# Altium PCB PCB1.PcbDoc
Units mil, origin at the board's own origin, x right, y up, seen from the top; angles counter-clockwise.
Board outline 3135 x 1590 mil, 2 copper layers (Top Layer, Bottom Layer); 34 components, 24 nets, 154 pads, 16 vias.
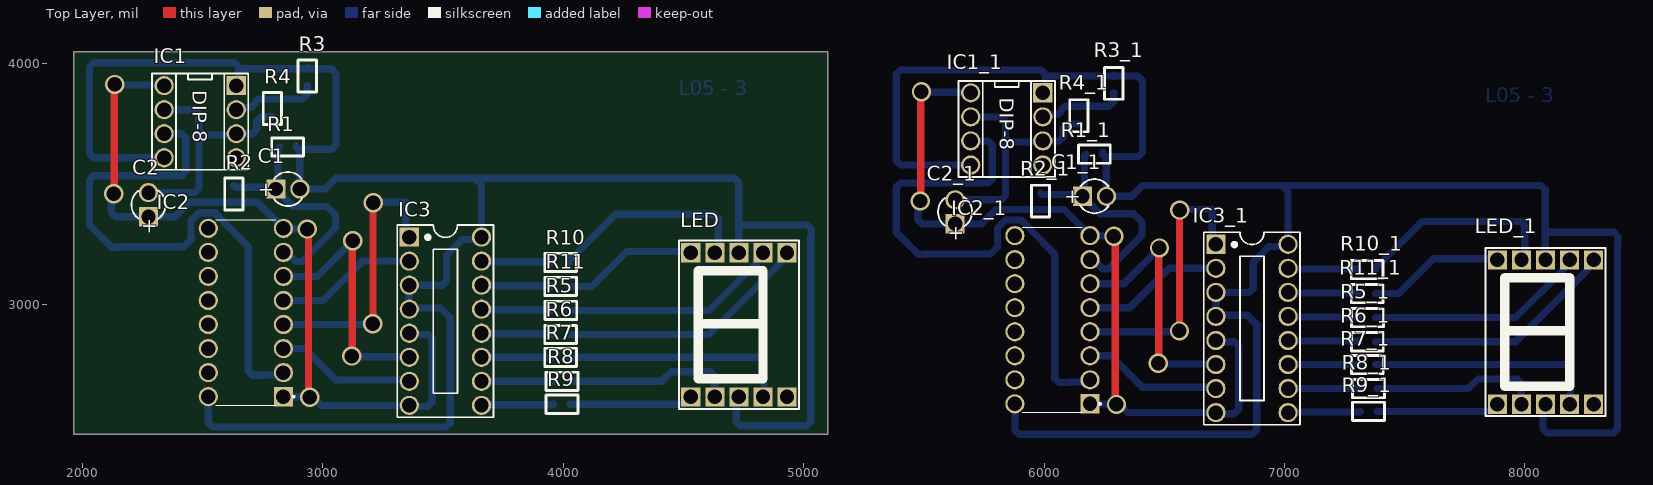
[diagram p0: Top Layer view]
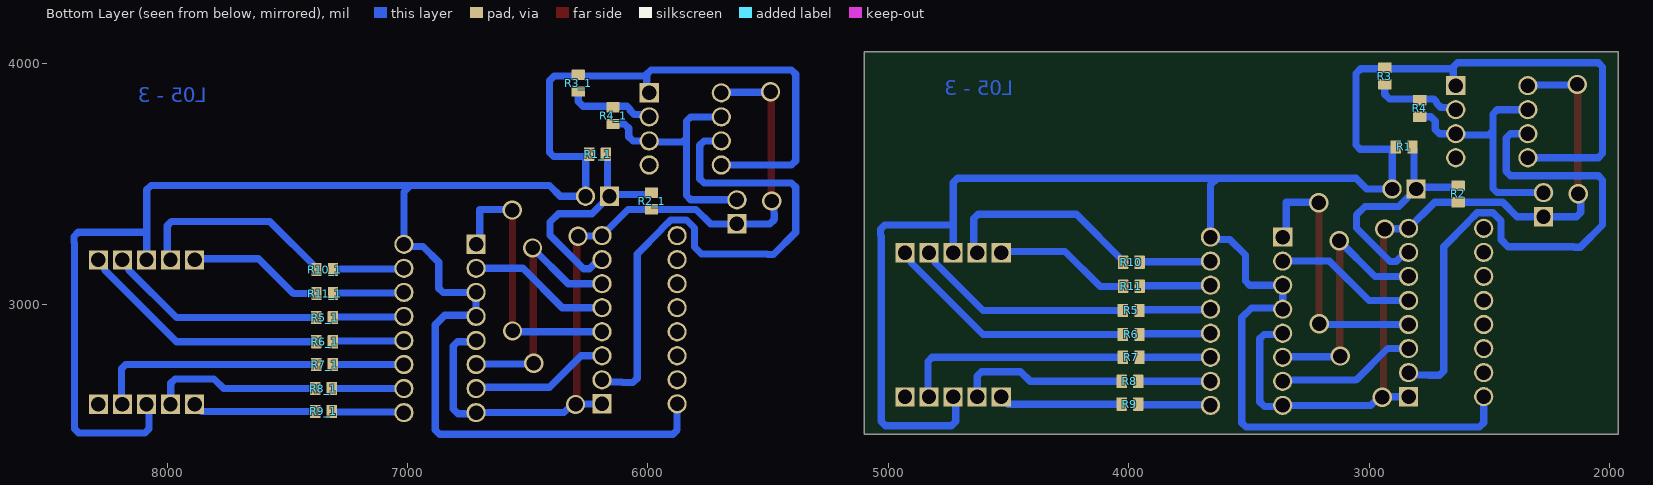
[diagram p1: Bottom Layer view, seen from below]

## Layer stack, top to bottom
Top Solder: solder mask 0.4, Solder Resist, Dk 3.5
Top Layer: signal copper 1.4
Dielectric 1: dielectric 12.6, FR-4, Dk 4.8
Bottom Layer: signal copper 1.4
Bottom Solder: solder mask 0.4, Solder Resist, Dk 3.5

## Board outline
1965,2460 5100,2460 5100,4050 1965,4050

## Design rules (kind name [scope] priority, off if disabled: settings)
Clearance [All] p1: gap=10 ignorepadtopadclearanceinfootprint=FALSE except(0: Arc-Hole Track-Hole SMDPad-Hole THPad-Hole Via-Hole Fill-Hole Poly-Hole Region-Hole Text-Hole)
PolygonConnect [All] p1: connectstyle=Relief reliefconductorwidth=10 reliefentries=4 polygonreliefangle="90 Angle" airgapwidth=10
RoutingVias [All] p1: holewidth=28 width=50 viastyle="Through Hole" minholewidth=28 minwidth=50 maxholewidth=28 maxwidth=50
SolderMaskExpansion [All] p1: expansion=4 istentingtop=FALSE
Width [All] p1: maxlimit=30 minlimit=30 preferedwidth=30
30 further rules are at their usual default settings.

## Classes and differential pairs
component class Sheet1: C1 C2 IC1 IC3 LED R1 R2 R3 R4 R5 R6 R7 R8 R9 R10 R11

## Components (designator, comment, footprint, x,y, rotation, side; value= is the part's Value field where it differs from the comment)
C1 "Cap" C3MM 2855,3480 r0 top value=4.7uF
C1_1 "Cap" C3MM 6210,3450 r0 top value=4.7uF (schematic designator C1)
C2 "Cap" C3MM 2275,3415 r90 top value=4.7uF
C2_1 "Cap" C3MM 5630,3385 r90 top value=4.7uF (schematic designator C2)
IC1 "LM555" DIP8 2490,3760 r270 top
IC1_1 "LM555" DIP8 5845,3730 r270 top (schematic designator IC1)
IC2 "IC4518" DIP794W45P254L1969H508Q16 2680,2966.3 r180 top
IC2_1 "IC4518" DIP794W45P254L1969H508Q16 6035,2936.3 r180 top (schematic designator IC2)
IC3 "IC7447" DIP16/W0.3 3360,3280 r270 top value="7447 , 74247"
IC3_1 "IC7447" DIP16/W0.3 6715,3250 r270 top value="7447 , 74247" (schematic designator IC3)
LED "7SEG-A" LED7SEG 4730,2915 r0 top
LED_1 "7SEG-A" LED7SEG 8085,2885 r0 top (schematic designator LED)
R1 "32K" "Res 0805 SMD" 2854.45,3655 r0 top
R1_1 "32K" "Res 0805 SMD" 6209.45,3625 r0 top (schematic designator R1)
R2 "6.8K" "Res 0805 SMD" 2630,3459.45 r90 top
R2_1 "6.8K" "Res 0805 SMD" 5985,3429.45 r90 top (schematic designator R2)
R3 "1.5K" "Res 0805 SMD" 2935,3950 r90 top
R3_1 "1.5K" "Res 0805 SMD" 6290,3920 r90 top (schematic designator R3)
R4 "82K" "Res 0805 SMD" 2790,3815 r90 top
R4_1 "82K" "Res 0805 SMD" 6145,3785 r90 top (schematic designator R4)
R5 "470" "Res 0805 SMD" 3990,2975 r180 top
R5_1 "470" "Res 0805 SMD" 7345,2945 r180 top (schematic designator R5)
R6 "470" "Res 0805 SMD" 3990,2875 r0 top
R6_1 "470" "Res 0805 SMD" 7345,2845 r0 top (schematic designator R6)
R7 "470" "Res 0805 SMD" 3990,2780 r0 top
R7_1 "470" "Res 0805 SMD" 7345,2750 r0 top (schematic designator R7)
R8 "470" "Res 0805 SMD" 3995,2680 r0 top
R8_1 "470" "Res 0805 SMD" 7350,2650 r0 top (schematic designator R8)
R9 "470" "Res 0805 SMD" 3995,2585 r0 top
R9_1 "470" "Res 0805 SMD" 7350,2555 r0 top (schematic designator R9)
R10 "470" "Res 0805 SMD" 3989.45,3175 r0 top
R10_1 "470" "Res 0805 SMD" 7344.45,3145 r0 top (schematic designator R10)
R11 "470" "Res 0805 SMD" 3989.45,3075 r0 top
R11_1 "470" "Res 0805 SMD" 7344.45,3045 r0 top (schematic designator R11)

## Footprints (in the part's own frame and the unit in brackets; to place one, negate y for a bottom-side part, rotate by r counter-clockwise, add the part's x,y. Pads: shape width x height; smd on the part's side, far side on the other; paste and mask are expansions set on the pad)
C3MM [mil]
  rect 80x80 hole 60: 1(-50,0)
  round 80 hole 60: 2(50,0)
  silkscreen extent -59,-71 59,71, body extent -79,-80 78,78, height 276
DIP8 [mil] "W.300/L.400"
  round 80 hole 60: 1(-150,-150) 2(-50,-150) 3(50,-150) 4(150,-150) 5(150,150) 6(50,150) 7(-50,150)
  rect 80x80 hole 60: 8(-150,150)
  silkscreen extent -200,-200 200,200, body extent -213,-153 213,153, height 177
DIP16/W0.3 [mil] "16 PIN, W 300mil, Pin to pin 100mil"
  rect 80x80 hole 60: 1(0,0)
  round 80 hole 60: 2(100,0) 3(200,0) 4(300,0) 5(400,0) 6(500,0) 7(600,0) 8(700,0) 9(700,300) 10(600,300) 11(500,300) 12(400,300) 13(300,300) 14(200,300) 15(100,300) 16(0,300)
  silkscreen extent -50,-50 750,350, body extent -52,-57 752,356, height 299
DIP794W45P254L1969H508Q16 [mil]
  rect 80x80 hole 60: 1(-156.3,350)
  round 80 hole 60: 2(-156.3,250) 3(-156.3,150) 4(-156.3,50) 5(-156.3,-50) 6(-156.3,-150) 7(-156.3,-250) 8(-156.3,-350) 9(156.3,-350) 10(156.3,-250) 11(156.3,-150) 12(156.3,-50) 13(156.3,50) 14(156.3,150) 15(156.3,250) 16(156.3,350)
  silkscreen extent -202,-385 125,385, body extent -380,-215 380,215, height 200
LED7SEG [mil] "LED7SEG"
  round 60 on Top Overlay: 0(186,-210)
  rect 80x80 hole 60: 1(-199,-300) 2(-99,-300) 3(1,-300) 4(101,-300) 5(201,-300) 6(201,300) 7(101,300) 8(1,300) 9(-99,300) 10(-199,300)
  silkscreen extent -249,-350 251,350, body extent -250,-375 250,375, height 316
"Res 0805 SMD" [mm] "Reflow Soldering"
  rrect10% 1.1x1.4 smd far side mask+0.1: 1(-0.875,0) 2(0.875,0)
  silkscreen extent -1.69,-0.97 1.67,0.96, body extent -1,-0.62 1,0.63, height 0.62

## Part data
C1 C1_1 C2 C2_1: "Capacitor", LatestRevisionDate=17-Jul-2002, LatestRevisionNote="Re-released for DXP Platform.", PackageReference=RAD-0.3, Published=8-Jun-2000, Publisher="Altium Limited"
IC1 IC1_1: "Timer"
IC2 IC2_1: library part CD4518BE, "CMOS Dual BCD Up-Counter 16-PDIP -55 to 125", Package="PDIP-16 Texas Instruments", Availability=Good, Check_prices=https://www.snapeda.com/parts/CD4518BE/Texas%20Instruments/view-part/2251593/?ref=eda, MF="Texas Instruments", MP=CD4518BE, Price=None, Purchase-URL=https://pricing.snapeda.com/search/part/CD4518BE/?ref=eda, SnapEDA_Link=https://www.snapeda.com/parts/CD4518BE/Texas%20Instruments/view-part/2251593/?ref=snap
IC3 IC3_1: library part 7447, "BCD to 7-Segment Decoder/Driver"
LED LED_1: library part LED7SEG-A, "14.2 mm General Purpose Blue 7-Segment Display: CA, RH DP, Gray Surface", Colour=Blue, PackageDocument=24-Sep-2002, ComponentLink1Description="Manufacturer Link", ComponentLink1URL=http://www.agilent.com/, DatasheetDocument=24-Sep-2002, LatestRevisionDate=17-Dec-2003, LatestRevisionNote="Schematic revised, PCB Footprint replaced.", MinimumIntensity="2020 ucd", Note="IF = 10 mA", PackageReference=H, Published=8-Jun-2000, Publisher="Altium Limited"
R1 R1_1 R2 R2_1 R3 R3_1 R4 R4_1 R5 R5_1 R6 R6_1 R7 R7_1 R8 R8_1 R9 R9_1 R10 R10_1 R11 R11_1: library part RES-0805, "RES SMD 249K OHM 1% 1/10W 0805", Manufacturer=Yageo, Manufacturer Part Number=RC0603FR-07249KL, Operating Temperature="-55°C ~ 155°C", Package / Case="0603 (1608 Metric)", Power (Watts)="0.1W, 1/10W", Supplier Device Package=0603, Temperature Coefficient=±100ppm/°C, Tolerance=±1%, Category=Resistors, ComponentLink1Description=http://www.yageo.com/documents/recent/PYu-RC_Group_51_RoHS_L_8.pdf, ComponentLink1URL=http://www.yageo.com/documents/recent/PYu-RC_Group_51_RoHS_L_8.pdf, Composition="Thick Film", Failure Rate=-, Features="Moisture Resistant", Height - Seated (Max)="0.022\" (0.55mm)", Packaging="Cut Tape (CT)", Part Status=Active, Pricing 1="1=0.1, 10=0.015, 100=0.006, 1000=0.00268, 2500=0.00233 (USD)", RoHS="RoHS Compliant", Size / Dimension="0.063\" L x 0.032\" W (1.60mm x 0.80mm)", Stock 1=370515, Supplier 1=Digi-Key

## Via types
v1: diameter 80, hole 60, Top Layer to Bottom Layer, 16 vias

## Nets (pads, with @x,y where several pads share a name; then routed paths per layer and width w, separated by ;. In a path a pad name is that pad's centre, name@x,y a point inside that pad or via, vN(x,y) a via of type N, cw(c..) or ccw(c..) an arc to the next point about the centre after c; other vN are vias at no path point)
GND: C2.1 IC1.1 IC2.1 IC2.8 IC3.5 IC3.8 R2.1 | length 3354
  Top Layer w30: v1(2130,3460) 2132.5,3462.5 2132.5,3912.5 v1(2135,3915) ; v1(2935.62,3313.14) 2940.87,3307.89 2940.87,2619.39 v1(2946.11,2614.15)
  Bottom Layer w30: v1(2130,3460) 2120.43,3450.43 2120.43,3407.86 2120,3407.43 2120,3382.57 2137.57,3365 C2.1 2385,3365 2445,3425 2727.6,3425 IC2.8 2837.88,3314.72 2934.04,3314.72 v1(2935.62,3313.14) ; v1(2135,3915) 2137.5,3912.5 2337.5,3912.5 IC1.1 ; IC2.1 2943.96,2616.3 v1(2946.11,2614.15) 2959.64,2614.15 2993.79,2580 IC3.8 3365,2575 3435,2575 3455,2595 3455,2857.43 3437.43,2875 3365,2875 IC3.5
NetC1_1: C1.1 IC2.7 R1.1 R2.2 | length 998.7
  Top Layer w30: C1.1@2797.76,3487.24 C1.1 C1.1@2813.35,3488.35
  Bottom Layer w30: R2.2 2636.65,3487.24 C1.1@2797.76,3487.24 ; C1.1 2877.5,3407.5 3017.5,3407.5 3052.57,3372.43 3052.57,3317.57 2913.28,3178.28 2887.84,3178.28 2849.83,3216.3 IC2.7 ; C1.1@2813.35,3488.35 2813.35,3648.35 R1.1
NetC2_2: C2.2 IC1.2 IC1.6 R4.1 | length 1071.1
  Bottom Layer w30: C2.2@2247.59,3465 2467.43,3465 2485,3482.57 2485,3722.57 ; IC1.2 2467.43,3810 2485,3792.43 2485,3722.57 ; R4.1 2742.57,3780.55 2725,3762.98 2725,3727.57 2707.43,3710 IC1.6 2635,3705 2502.57,3705 2485,3722.57
NetIC1_3: IC1.3 IC2.2 | length 2378.5
  Bottom Layer w30: IC1.3 2412.43,3710 2430,3692.43 2430,3552.57 2412.43,3535 2047.57,3535 2030,3517.43 2030,3330 2122.57,3237.43 2147.43,3237.43 2150,3240 2422.43,3240 2451.21,3268.79 2451.21,3347.43 2485.09,3381.3 2550.62,3381.3 2588.7,3343.22 2588.7,3341.3 2690,3240 2690,2722.57 2707.57,2705 2751.47,2705 2753.2,2706.73 2826.73,2706.73 IC2.2
NetIC1_7: IC1.7 R3.1 R4.2 | length 361.4
  Bottom Layer w30: IC1.7 2649.57,3819.57 2702.43,3819.57 2720,3837.14 2720,3842.43 2731.94,3854.37 2915.63,3854.37 2935,3873.74 R3.1@2935,3910.63
NetIC2_3: IC2.3 IC3.7 | length 580.2
  Bottom Layer w30: IC2.3 2923.7,2816.3 3055,2685 3355,2685 IC3.7
NetIC2_4: IC2.4 IC3.1 | length 1164.1
  Top Layer w30: v1(3208.27,2919.67) 3209.08,2920.48 3209.08,3421.54 v1(3209.89,3422.35)
  Bottom Layer w30: IC2.4 3204.89,2916.3 v1(3208.27,2919.67) ; v1(3209.89,3422.35) 3212.53,3425 3345,3425 3345,3295 IC3.1
NetIC2_5: IC2.5 IC3.2 | length 591.5
  Bottom Layer w30: IC2.5 3001.3,3016.3 3165,3180 IC3.2
NetIC2_6: IC2.6 IC3.6 | length 1074.4
  Top Layer w30: v1(3120,2785) 3122.5,2787.5 3122.5,3262.5 v1(3125,3265)
  Bottom Layer w30: IC2.6 2976.3,3116.3 v1(3125,3265) ; v1(3120,2785) 3122.5,2782.5 3357.5,2782.5 IC3.6
NetIC3_9: IC3.9 R9.1 | length 330.9
  Top Layer w10: IC3.9 IC3.9@3680,2560
  Bottom Layer w30: IC3.9 3662.5,2582.5 3958.05,2582.5 R9.1
NetIC3_10: IC3.10 R8.1 | length 300.6
  Bottom Layer w30: IC3.10 R8.1
NetIC3_11: IC3.11 R7.1 | length 295.6
  Bottom Layer w30: IC3.11 R7.1
NetIC3_12: IC3.12 R6.1 | length 326.2
  Top Layer w10: IC3.12 IC3.12@3688.53,2880
  Bottom Layer w30: IC3.12 3662.5,2877.5 3953.05,2877.5 R6.1
NetIC3_13: IC3.13 R5.2 | length 297.6
  Bottom Layer w30: IC3.13 3662.5,2977.5 3953.05,2977.5 R5.2
NetIC3_14: IC3.14 R11.1 | length 297.1
  Bottom Layer w30: IC3.14 3662.5,3077.5 3952.5,3077.5 R11.1
NetIC3_15: IC3.15 R10.1 | length 297.1
  Bottom Layer w30: IC3.15 3662.5,3177.5 3952.5,3177.5 R10.1
NetLED_1: LED.1 R9.2 | length 514
  Bottom Layer w30: R9.2 4501,2585 LED.1
NetLED_2: LED.2 R8.2 | length 712.2
  Bottom Layer w30: R8.2 4410,2680 4450,2720 4612.43,2720 4630,2702.43 4630,2616 LED.2
NetLED_4: LED.4 R7.2 | length 966.9
  Bottom Layer w30: R7.2 4817.43,2780 4835,2762.43 4835,2619 LED.4
NetLED_6: LED.6 R6.2 | length 1056.4
  Bottom Layer w30: R6.2 4606.36,2875 4906,3174.64 4906,3190 LED.6
NetLED_7: LED.7 R5.1 | length 915
  Bottom Layer w30: R5.1 4606.35,2975 4806,3174.64 4806,3190 LED.7
NetLED_9: LED.9 R10.2 | length 862.9
  Bottom Layer w30: R10.2 4023.9,3180.91 4217.99,3375 4627.43,3375 4645,3357.43 4645,3229 LED.9
NetLED_10: LED.10 R11.2 | length 569.2
  Bottom Layer w30: R11.2 4120,3075 4265,3220 4526,3220 LED.10
Vcc: C1.2 IC1.4 IC1.8 IC2.16 IC3.3 IC3.4 IC3.16 LED.3 LED.8 R1.2 R3.2 | length 8697.8
  Top Layer w30: IC1.8 IC1.8@2640.55,3909.45
  Bottom Layer w30: IC1.4 2047.57,3610 2030,3627.57 2030,3987.43 2047.57,4005 2632.43,4005 2650,3987.43 2650,3920 IC1.8 ; IC2.16 2523.7,2507.57 2541.27,2490 3512.43,2490 3530,2507.57 3530,2945 3490,2985 3365,2985 IC3.4 IC3.3 3497.43,3080 3515,3097.57 3515,3205 3580.43,3270.43 3650.43,3270.43 IC3.16 3660,3497.43 3632.43,3525 ; 2650,3980 3035,3980 3055,3960 3055,3662.57 3037.43,3645 2903.82,3645 2903.82,3481.18 C1.2 3010,3480 3055,3525 3632.43,3525 ; R1.2@2888.9,3660.91 R1.2 R1.2@2895.55,3648.35 ; R3.2 R3.2@2941.95,3977.5 ; LED.3 4720,2604 4720,2512.57 4737.57,2495 5012.43,2495 5030,2512.57 5030,3285 5032.57,3287.57 5032.57,3312.43 5015,3330 4730,3330 ; LED.8 4730,3216 4730,3330 ; 3632.43,3525 4712.43,3525 4730,3507.43 4730,3330
pads on no net: C1_1.1 C1_1.2 C2_1.1 C2_1.2 IC1.5 IC1_1.1 IC1_1.2 IC1_1.3 IC1_1.4 IC1_1.5 IC1_1.6 IC1_1.7 IC1_1.8 IC2.9 IC2.10 IC2.11 IC2.12 IC2.13 IC2.14 IC2.15 IC2_1.1 IC2_1.2 IC2_1.3 IC2_1.4 IC2_1.5 IC2_1.6 IC2_1.7 IC2_1.8 IC2_1.9 IC2_1.10 IC2_1.11 IC2_1.12 IC2_1.13 IC2_1.14 IC2_1.15 IC2_1.16 IC3_1.1 IC3_1.2 IC3_1.3 IC3_1.4 IC3_1.5 IC3_1.6 IC3_1.7 IC3_1.8 IC3_1.9 IC3_1.10 IC3_1.11 IC3_1.12 IC3_1.13 IC3_1.14 IC3_1.15 IC3_1.16 LED.0 LED.5 LED_1.0 LED_1.1 LED_1.2 LED_1.3 LED_1.4 LED_1.5 LED_1.6 LED_1.7 LED_1.8 LED_1.9 LED_1.10 R1_1.1 R1_1.2 R2_1.1 R2_1.2 R3_1.1 R3_1.2 R4_1.1 R4_1.2 R5_1.1 R5_1.2 R6_1.1 R6_1.2 R7_1.1 R7_1.2 R8_1.1 R8_1.2 R9_1.1 R9_1.2 R10_1.1 R10_1.2 R11_1.1 R11_1.2
copper on no net: | length 28013.2
  Top Layer w10: 7015,2550 7035,2530 ; 7015,2850 7043.53,2850
  Top Layer w30: v1(5485,3430) 5487.5,3432.5 5487.5,3882.5 v1(5490,3885) ; 5995,3880 5995.55,3879.45 ; 6152.76,3457.24 6160,3450 6168.35,3458.35 ; v1(6290.62,3283.14) 6295.87,3277.89 6295.87,2589.39 v1(6301.11,2584.15) ; v1(6475,2755) 6477.5,2757.5 6477.5,3232.5 v1(6480,3235) ; v1(6563.27,2889.67) 6564.08,2890.48 6564.08,3391.54 v1(6564.89,3392.35)
  Bottom Layer w30: v1(5485,3430) 5475.43,3420.43 5475.43,3377.86 5475,3377.43 5475,3352.57 5492.57,3335 5630,3335 5740,3335 5800,3395 6082.6,3395 6191.3,3286.3 6192.88,3284.72 6289.04,3284.72 v1(6290.62,3283.14) ; v1(5490,3885) 5492.5,3882.5 5692.5,3882.5 5695,3880 ; 5602.59,3435 5822.43,3435 5840,3452.57 5840,3692.57 ; 5695,3580 5402.57,3580 5385,3597.57 5385,3957.43 5402.57,3975 5987.43,3975 6005,3957.43 6005,3890 5995,3880 ; 5695,3680 5767.43,3680 5785,3662.43 5785,3522.57 5767.43,3505 5402.57,3505 5385,3487.43 5385,3300 5477.57,3207.43 5502.43,3207.43 5505,3210 5777.43,3210 5806.21,3238.79 5806.21,3317.43 5840.09,3351.3 5905.62,3351.3 5943.7,3313.22 5943.7,3311.3 6045,3210 6045,2692.57 6062.57,2675 6106.47,2675 6108.2,2676.73 6181.73,2676.73 6191.3,2686.3 ; 5695,3780 5822.43,3780 5840,3762.43 5840,3692.57 ; 5878.7,2586.3 5878.7,2477.57 5896.27,2460 6867.43,2460 6885,2477.57 6885,2915 6845,2955 6720,2955 6715,2950 6715,3050 6852.43,3050 6870,3067.57 6870,3175 6935.43,3240.43 7005.43,3240.43 7015,3250 7015,3467.43 6987.43,3495 ; 5985,3463.9 5991.65,3457.24 6152.76,3457.24 ; 5995,3780 6004.57,3789.57 6057.43,3789.57 6075,3807.14 6075,3812.43 6086.94,3824.37 6270.63,3824.37 6290,3843.74 6290,3880.63 ; 6005,3950 6390,3950 6410,3930 6410,3632.57 6392.43,3615 6258.82,3615 6258.82,3451.18 6260,3450 6365,3450 6410,3495 6987.43,3495 ; 6145,3750.55 6097.57,3750.55 6080,3732.98 6080,3697.57 6062.43,3680 5995,3680 5990,3675 5857.57,3675 5840,3692.57 ; 6160,3450 6232.5,3377.5 6372.5,3377.5 6407.57,3342.43 6407.57,3287.57 6268.28,3148.28 6242.84,3148.28 6204.83,3186.3 6191.3,3186.3 ; 6168.35,3458.35 6168.35,3618.35 6175,3625 ; 6191.3,2586.3 6298.96,2586.3 v1(6301.11,2584.15) 6314.64,2584.15 6348.79,2550 6715,2550 6720,2545 6790,2545 6810,2565 6810,2827.43 6792.43,2845 6720,2845 6715,2850 ; 6191.3,2786.3 6278.7,2786.3 6410,2655 6710,2655 6715,2650 ; 6191.3,2886.3 6559.89,2886.3 v1(6563.27,2889.67) ; 6191.3,2986.3 6356.3,2986.3 6520,3150 6715,3150 ; 6191.3,3086.3 6331.3,3086.3 v1(6480,3235) ; 6243.9,3630.91 6243.9,3625 6250.55,3618.35 ; 6290,3954.45 6296.95,3947.5 ; v1(6475,2755) 6477.5,2752.5 6712.5,2752.5 6715,2750 ; v1(6564.89,3392.35) 6567.53,3395 6700,3395 6700,3265 6715,3250 ; 7015,2550 7017.5,2552.5 7313.05,2552.5 7315.55,2555 ; 7015,2650 7315.55,2650 ; 7015,2750 7310.55,2750 ; 7015,2850 7017.5,2847.5 7308.05,2847.5 7310.55,2845 ; 7015,2950 7017.5,2947.5 7308.05,2947.5 7310.55,2945 ; 7015,3050 7017.5,3047.5 7307.5,3047.5 7310,3045 ; 7015,3150 7017.5,3147.5 7307.5,3147.5 7310,3145 ; 7378.9,3045 7475,3045 7620,3190 7881,3190 7886,3185 ; 7378.9,3145 7378.9,3150.91 7572.99,3345 7982.43,3345 8000,3327.43 8000,3199 7986,3185 ; 7379.45,2750 8172.43,2750 8190,2732.43 8190,2589 8186,2585 ; 7379.45,2845 7961.36,2845 8261,3144.64 8261,3160 8286,3185 ; 7379.45,2945 7961.35,2945 8161,3144.64 8161,3160 8186,3185 ; 7384.45,2555 7856,2555 7886,2585 ; 7384.45,2650 7765,2650 7805,2690 7967.43,2690 7985,2672.43 7985,2586 7986,2585 ; 8086,2585 8075,2574 8075,2482.57 8092.57,2465 8367.43,2465 8385,2482.57 8385,3255 8387.57,3257.57 8387.57,3282.43 8370,3300 8085,3300 ; 8086,3185 8085,3186 8085,3300 ; 6987.43,3495 8067.43,3495 8085,3477.43 8085,3300

## Other copper
Bottom Layer:
  text "L05 - 3" at 4480,3870 h60
  text "L05 - 3" at 7835,3840 h60

## Text inside footprints (layer, text, board x,y; h text height)
C1: Top Overlay "+" at 2730,3450 h60
C1_1: Top Overlay "+" at 6085,3420 h60
C2: Top Overlay "+" at 2305,3290 h60 r90
C2_1: Top Overlay "+" at 5660,3260 h60 r90
IC1: Top Overlay "DIP-8" at 2460,3890 h59.05 r270
IC1_1: Top Overlay "DIP-8" at 5815,3860 h59.05 r270